# Altium PCB V6.pcbdoc
Units mil, origin at the board's own origin, x right, y up, seen from the top; angles counter-clockwise.
Board outline 9149.63 x 2054.4 mil, 2 copper layers (Top Layer, Bottom Layer); 47 components, 58 nets, 217 pads, 23 vias.
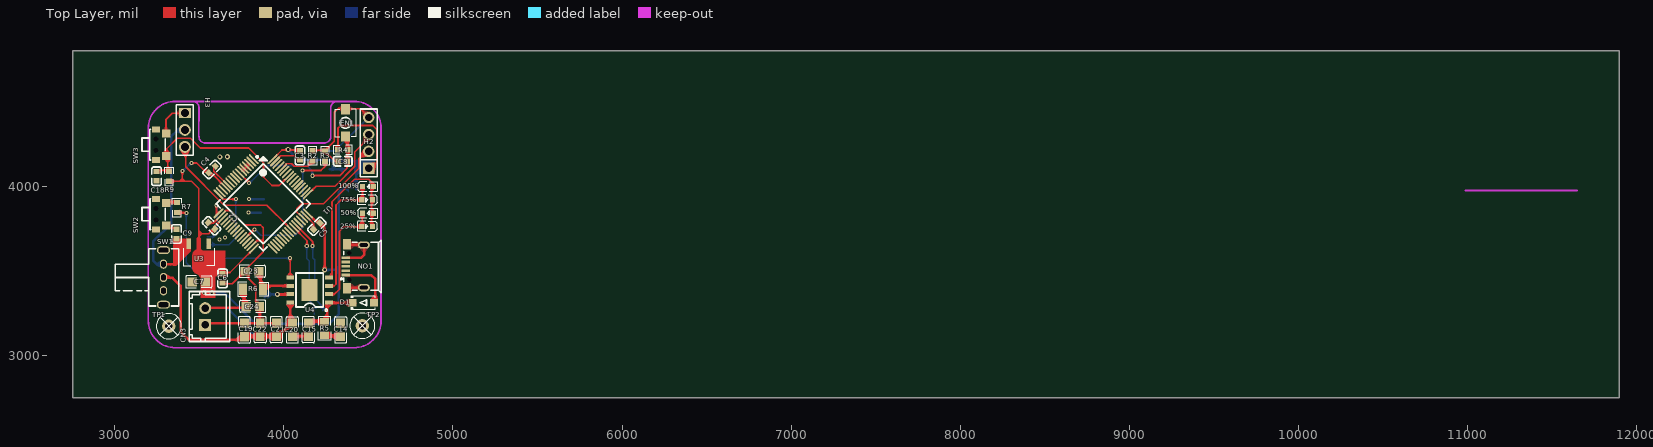
[diagram p0: Top Layer view]
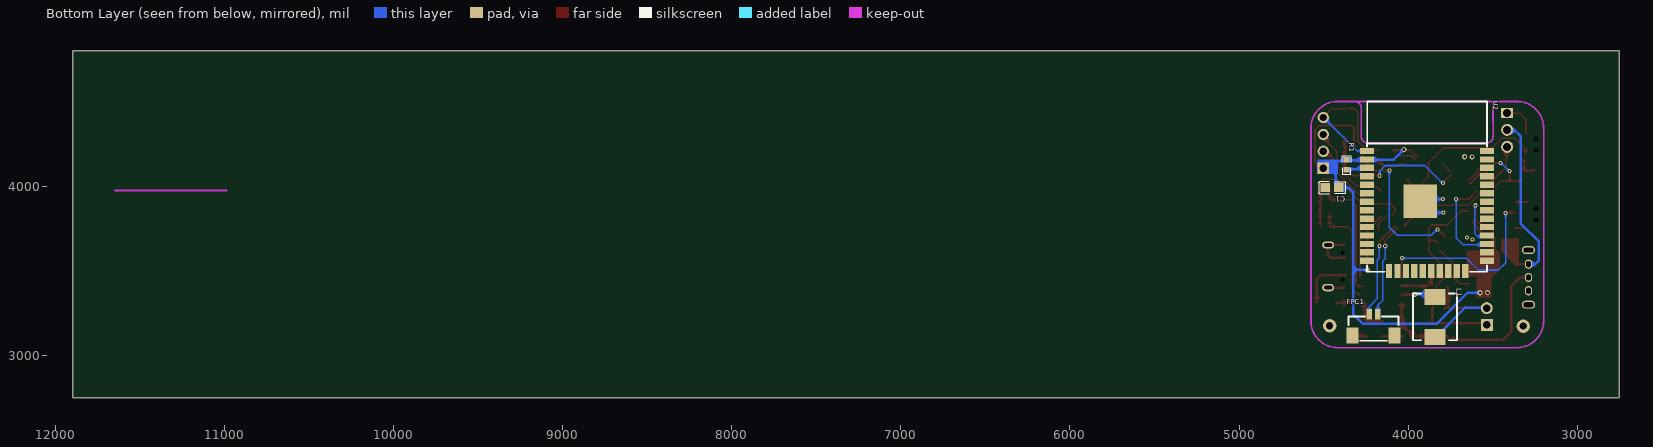
[diagram p1: Bottom Layer view, seen from below]

## Layer stack, top to bottom
Top Layer: signal copper (thickness not stored)
Dielectric: dielectric 12.6, FR-4, Dk 4.8
Bottom Layer: signal copper (thickness not stored)

## Board outline
11899.63,2750 2750,2750 2750,4804.4 11899.63,4804.4

## Components (designator, comment, footprint, x,y, rotation, side; value= is the part's Value field where it differs from the comment)
25% "19-217/GHC-YR1S2/3T" LED0603-RD 4492.49,3764.22 r180 top
50% "19-217/GHC-YR1S2/3T" LED0603-RD 4496.39,3842.58 r0 top
75% "19-217/GHC-YR1S2/3T" LED0603-RD 4492.49,3921.79 r180 top
100% "19-217/GHC-YR1S2/3T" LED0603-RD 4496.39,4000.14 r0 top
C1 "10uF" C0805 4450.2,3993.13 r0 bottom
C2 "104" C0603 3571.42,3768.45 r135 top
C3 "104" C0603 4094.39,4184.4 r270 top
C4 "104" C0603 3574.99,4101.12 r45 top
C5 "104" C0603 4194.47,3764.96 r225 top
C6 "104" C0603 3637.53,3457.25 r90 top
C7 "10uF" C0805 3496.63,3435.97 r180 top
C8 "104" C0603 4348.46,4149.75 r0 top
C9 "104" C0603 3364.45,3719.54 r270 top
C14 "GRM21BR61H106KE43L" C0805 4334.92,3152.59 r270 top
C15 "GRM21BR61H106KE43L" C0805 4144.33,3152.59 r90 top
C18 "104" C0603 3247.05,4061.24 r90 top
C19 "C2012X5R1V226MT000E" C0805 3765.64,3151.92 r90 top
C20 "C2012X5R1V226MT000E" C0805 4049.56,3152.59 r270 top
C21 "C2012X5R1V226MT000E" C0805 3954.79,3152.59 r90 top
C22 "C2012X5R1V226MT000E" C0805 3860.03,3152.59 r90 top
C23 "C2012X5R1V226MT000E" C0805 3811.69,3499.18 r180 top
C24 "C2012X5R1V226MT000E" C0805 3816.3,3291.18 r0 top
CN3 "HX25003-2A" CONN-TH_2P-P2.50_HX25003-2A 3534.5,3231.54 r90 top
D1 "SS14_C2909920" SOD-123FL_L2.8-W1.8-LS3.7-RD 4468.7,3312.8 r0 top
EN1 "TSA343G00-250J2" SW-SMD_L4.0-W2.9-LS5.0 4364.03,4376.95 r90 top
FPC1 "1.25-2PS" CONN-SMD_2P-P1.25_DEALON_1.25-2PS 4204.35,3181.72 r180 bottom
H2 "PH-00015" HDR-TH_4P-P2.54-V-M 4501.53,4258.52 r90 top
H3 "Z-211-0311-0021-001" HDR-TH_3P-P2.54-V-M-1 3414.45,4335.19 r270 top
L1 "FXL0618-1R0-M" IND-SMD_L7.0-W6.6 3841.08,3229.24 r270 bottom
NO1 "MICROUSB-5PIN" USB-SMD_5P_MICROUSB-5PIN 4419.71,3528.39 r90 top
R1 "10k" R0603 4364.13,4128.44 r270 bottom
R2 "0603WAF1003T5E" R0603 4169.68,4181.46 r90 top
R3 "0603WAF1003T5E" R0603 4242.48,4180.47 r90 top
R4 "ERA3VEB1001V" R0603 4348.24,4217.87 r0 top
R5 "0805W8F200KT5E" R0805 4239.62,3160.56 r90 top
R6 "1206W4F500LT5E" R1206 3816.81,3393.06 r180 top
R7 "0603WAF1002T5E" R0603 3366.93,3876.11 r270 top
R9 "0603WAF1002T5E" R0603 3320.22,4060.1 r270 top
SW1 "SK-12D02-VG5_C136722" SW-TH_SK-12D02-VG5 3287.79,3462.44 r270 top
SW2 "TS24CA" SW-SMD_TS24CA 3273.5,3836.64 r90 top
SW3 "TS24CA" SW-SMD_TS24CA 3273.25,4248 r90 top
TP1 "M2螺丝" M2螺丝 3319.05,3174.25 r0 top
TP2 "M2螺丝" M2螺丝 4463.85,3176.59 r0 top
U1 "STM32F103RCT6" LQFP-64_L10.0-W10.0-P0.50-LS12.0-BL 3877.67,3897.81 r225 top
U2 "ESP32-WROOM-32D-N4_C473012" WIFIM-SMD_39P-L25.5-W18.0-P1.27-BL 3887.77,3855.66 r270 bottom
U3 "AMS1117-3.3_C880752" SOT-89-3_L4.5-W2.5-P1.50-LS4.2-BR 3496.16,3608.82 r90 top
U4 "IP5306" ESOP-8_L4.9-W3.9-P1.27-LS6.0-BL-EP 4152.01,3388.12 r90 top

## Footprints (in the part's own frame and the unit in brackets; to place one, negate y for a bottom-side part, rotate by r counter-clockwise, add the part's x,y. Pads: shape width x height; smd on the part's side, far side on the other; paste and mask are expansions set on the pad)
C0603 [mm]
  rect 0.8x0.9 smd paste+0 mask+0.051: 1(-0.7,0) 2(0.7,0)
  silkscreen extent -1.41,-0.71 1.39,0.72
C0805 [mm]
  rect 1.41x1.35 smd paste-100 mask+0.051: 1(-1,0) 2(1,0)
  silkscreen extent -1.96,-0.9 1.96,0.9
CONN-SMD_2P-P1.25_DEALON_1.25-2PS [mm]
  rect 0.8x1.6 smd paste+0 mask+0.05: 1(-0.625,1.6) 2(0.625,1.6)
  rect 1.8x2.4 smd paste+0 mask+0.05: 3(-3.175,-1.6) 4(3.175,-1.6)
  silkscreen extent -3.75,-2.4 3.75,1.25
CONN-TH_2P-P2.50_HX25003-2A [mm]
  rect 1.8x1.8 hole 1.1 paste+0 mask+0.05: 1(-1.25,0)
  round 1.8 hole 1.1 paste+0 mask+0.05: 2(1.25,0)
  silkscreen extent -3.75,-3.7 3.75,2.41
ESOP-8_L4.9-W3.9-P1.27-LS6.0-BL-EP [mm]
  rect 0.6x1.2 smd paste+0 mask+0.051: 1(-1.905,-2.908) 2(-0.635,-2.908) 3(0.635,-2.908) 4(1.905,-2.908) 5(1.905,2.908) 6(0.635,2.908) 7(-0.635,2.908) 8(-1.905,2.908)
  rect 3.3x2.4 smd paste+0 mask+0.051: 9(0,0)
  silkscreen extent -3.2,-2.67 2.55,2.05
HDR-TH_3P-P2.54-V-M-1 [mm]
  rect 1.575x1.8 hole 1.2 paste+0 mask+0.051: 1(-2.54,0)
  round 1.8 hole 1.2 paste+0 mask+0.051: 2(0,0) 3(2.54,0)
  silkscreen extent -3.81,-1.27 3.81,1.27
HDR-TH_4P-P2.54-V-M [mm]
  rect 1.7x1.7 hole 1.1 paste+0 mask+0.051: 1(-3.81,0)
  round 1.7 hole 1.1 paste+0 mask+0.051: 2(-1.27,0) 3(1.27,0) 4(3.81,0)
  silkscreen extent -5.08,-1.27 5.08,1.27
IND-SMD_L7.0-W6.6 [mm]
  rect 2.4x3.2 smd paste+0 mask+0.051: 1(-3,0) 2(3,0)
  silkscreen extent -3.5,-3.3 3.5,3.3
LED0603-RD [mm]
  rect 0.8x0.8 smd paste+0 mask+0.051: 1(-0.799,-0.003) 2(0.799,0.003)
  silkscreen extent -1.49,-0.75 1.39,0.76
LQFP-64_L10.0-W10.0-P0.50-LS12.0-BL [mm]
  oval 0.3x2 smd paste+0 mask+0.051: 1(-3.75,-5.75) 2(-3.25,-5.75) 3(-2.75,-5.75) 4(-2.25,-5.75) 5(-1.75,-5.75) 6(-1.25,-5.75) 7(-0.75,-5.75) 8(-0.25,-5.75) 9(0.25,-5.75) 10(0.75,-5.75) 11(1.25,-5.75) 12(1.75,-5.75) 13(2.25,-5.75) 14(2.75,-5.75) 15(3.25,-5.75) 16(3.75,-5.75) 33(3.75,5.75) 34(3.25,5.75) 35(2.75,5.75) 36(2.25,5.75) 37(1.75,5.75) 38(1.25,5.75) 39(0.75,5.75) 40(0.25,5.75) 41(-0.25,5.75) 42(-0.75,5.75) 43(-1.25,5.75) 44(-1.75,5.75) 45(-2.25,5.75) 46(-2.75,5.75) 47(-3.25,5.75) 48(-3.75,5.75)
  oval 2x0.3 smd paste+0 mask+0.051: 17(5.75,-3.75) 18(5.75,-3.25) 19(5.75,-2.75) 20(5.75,-2.25) 21(5.75,-1.75) 22(5.75,-1.25) 23(5.75,-0.75) 24(5.75,-0.25) 25(5.75,0.25) 26(5.75,0.75) 27(5.75,1.25) 28(5.75,1.75) 29(5.75,2.25) 30(5.75,2.75) 31(5.75,3.25) 32(5.75,3.75) 49(-5.75,3.75) 50(-5.75,3.25) 51(-5.75,2.75) 52(-5.75,2.25) 53(-5.75,1.75) 54(-5.75,1.25) 55(-5.75,0.75) 56(-5.75,0.25) 57(-5.75,-0.25) 58(-5.75,-0.75) 59(-5.75,-1.25) 60(-5.75,-1.75) 61(-5.75,-2.25) 62(-5.75,-2.75) 63(-5.75,-3.25) 64(-5.75,-3.75)
  silkscreen extent -5,-5.79 5,5
M2螺丝 [mm]
  round 2 hole 1.07 mask+0.051: 1(0,0)
  silkscreen extent -1.9,-1.9 1.9,1.9
R0603 [mil]
  rect 31.75x34.02 smd paste-3937.01 mask+2: 1(-29.66,0) 2(29.66,0)
  silkscreen extent -55,-26 55,26
R0805 [mm]
  rect 1.133x1.377 smd paste-100 mask+0.051: 1(-1,0) 2(1,0)
  silkscreen extent -1.76,-0.92 1.76,0.92
R1206 [mil]
  rect 47.54x66.97 smd paste-3937.01 mask+2: 1(-58.22,0) 2(58.22,0)
  silkscreen extent -91,-42 91,42
SOD-123FL_L2.8-W1.8-LS3.7-RD [mm]
  rect 1.2x1.2 smd paste+0 mask+0.051: 1(-1.6,0) 2(1.6,0)
  silkscreen extent -1.9,-1 1.8,1
SOT-89-3_L4.5-W2.5-P1.50-LS4.2-BR [mm]
  rect 1.575x0.672 smd paste+0 mask+0.051: 1(1.356,-1.5) 3(1.356,1.5)
  Top Layer region: -2.283,0.95 -0.429,0.95 -0.384,0.949 -0.34,0.946 -0.296,0.94 -0.252,0.933 -0.208,0.924 -0.165,0.912 -0.123,0.899 -0.081,0.884 -0.04,0.866 0,0.847 0.04,0.826 0.078,0.803 0.115,0.779 0.151,0.752 0.185,0.724 0.219,0.695 0.251,0.664 0.281,0.631 0.31,0.597 0.337,0.562 0.362,0.525 0.386,0.488 0.408,0.449 0.428,0.409 0.447,0.33 2.144,0.33 2.144,-0.33 0.447,-0.33 0.428,-0.409 0.408,-0.449 0.386,-0.488 0.362,-0.526 0.337,-0.562 0.31,-0.597 0.281,-0.631 0.251,-0.664 0.219,-0.695 0.185,-0.725 0.151,-0.753 0.115,-0.779 0.078,-0.804 0.04,-0.827 0,-0.848 -0.04,-0.867 -0.081,-0.884 -0.123,-0.899 -0.165,-0.913 -0.208,-0.924 -0.252,-0.934 -0.296,-0.941 -0.34,-0.946 -0.384,-0.949 -0.429,-0.95 -2.283,-0.95 -2.328,-0.949 -2.372,-0.946 -2.416,-0.941 -2.46,-0.934 -2.504,-0.924 -2.547,-0.913 -2.589,-0.899 -2.631,-0.884 -2.672,-0.867 -2.713,-0.848 -2.752,-0.827 -2.79,-0.804 -2.827,-0.779 -2.863,-0.753 -2.898,-0.725 -2.931,-0.695 -2.963,-0.664 -2.993,-0.631 -3.022,-0.597 -3.049,-0.562 -3.075,-0.526 -3.098,-0.488 -3.12,-0.449 -3.141,-0.409 -3.159,-0.369 -3.175,-0.327 -3.189,-0.285 -3.202,-0.242 -3.212,-0.199 -3.22,-0.155 -3.227,-0.111 -3.231,-0.067 -3.233,-0.022 -3.233,0.022 -3.231,0.067 -3.227,0.111 -3.22,0.155 -3.212,0.199 -3.202,0.242 -3.189,0.285 -3.175,0.327 -3.159,0.369 -3.141,0.409 -3.12,0.449 -3.098,0.488 -3.075,0.525 -3.049,0.562 -3.022,0.597 -2.993,0.631 -2.963,0.664 -2.931,0.695 -2.898,0.724 -2.863,0.752 -2.827,0.779 -2.79,0.803 -2.752,0.826 -2.713,0.847 -2.672,0.866 -2.631,0.884 -2.589,0.899 -2.547,0.912 -2.504,0.924 -2.46,0.933 -2.416,0.94 -2.372,0.946 -2.328,0.949
  silkscreen extent -1.95,-2.33 0.7,2.33
SW-SMD_L4.0-W2.9-LS5.0 [mm]
  rect 1.53x1.36 smd paste+0 mask+0.051: 1(-2.035,0) 2(2.035,0)
  silkscreen extent -2.08,-1.58 2.08,1.58
SW-SMD_TS24CA [mm]
  rect 0.9x1.2 smd paste+0 mask+0.051: 1(-2.3,0.775) 2(2.3,0.775)
  rect 1.2x1.3 smd paste+0 mask+0.051: 3(-1.675,-0.775) 4(1.675,-0.775)
  Multi-Layer board cut-out: -0.85,0.425 -0.698,0.46 -0.576,0.557 -0.509,0.697 -0.509,0.853 -0.576,0.993 -0.698,1.09 -0.85,1.125 -0.85,1.125 -1.002,1.09 -1.124,0.993 -1.191,0.853 -1.191,0.697 -1.124,0.557 -1.002,0.46 -0.85,0.425
  Multi-Layer board cut-out: 0.85,0.425 1.002,0.46 1.124,0.557 1.191,0.697 1.191,0.853 1.124,0.993 1.002,1.09 0.85,1.125 0.85,1.125 0.698,1.09 0.576,0.993 0.509,0.853 0.509,0.697 0.576,0.557 0.698,0.46 0.85,0.425
  silkscreen extent -2.3,-0.62 2.3,2.88
SW-TH_SK-12D02-VG5 [mm]
  oval 1.4x1.1 hole 0.7 slot 0.9 at 0 deg copper offset 0.001,0 paste+0 mask+0.051: 1(-2,-0.001)
  oval 1.4x1.1 hole 0.7 slot 0.9 at 0 deg paste+0 mask+0.051: 2(0,0)
  oval 1.4x1.1 hole 0.7 slot 0.9 at 0 deg copper offset -0.001,0 paste+0 mask+0.051: 3(2,0.001)
  oval 1.2x2 hole 0.7 slot 1.5 at 90 deg copper offset 0,-0.001 paste+0 mask+0.051: 4(4.099,0)
  oval 1.2x2 hole 0.7 slot 1.5 at 90 deg copper offset 0,0 paste+0 mask+0.051: 5(-4.1,0)
  silkscreen extent -4.3,-7.25 4.3,2.27
USB-SMD_5P_MICROUSB-5PIN [mm]
  rect 0.4x1.3 smd paste-100 mask+0.05: 1(-1.3,1.345) 2(-0.65,1.345) 3(0,1.345) 4(0.65,1.345) 5(1.3,1.345)
  rect 1.6x1.2 smd paste-100 mask+0.05: 6(3.3,1.185) 7(-3.3,1.185)
  oval 1.1x1.8 hole 0.5 slot 1.2 at 90 deg paste+0 mask+0.05: 8(3.2,-1.345) 9(-3.2,-1.345)
  Multi-Layer board cut-out: 2,0.555 2.13,0.585 2.235,0.668 2.292,0.788 2.292,0.922 2.235,1.042 2.13,1.125 2,1.155 2,1.155 1.87,1.125 1.765,1.042 1.708,0.922 1.708,0.788 1.765,0.668 1.87,0.585 2,0.555
  Multi-Layer board cut-out: -2,0.525 -1.87,0.555 -1.765,0.638 -1.708,0.758 -1.708,0.892 -1.765,1.012 -1.87,1.095 -2,1.125 -2,1.125 -2.13,1.095 -2.235,1.012 -2.292,0.892 -2.292,0.758 -2.235,0.638 -2.13,0.555 -2,0.525
  silkscreen extent -3.99,-3.96 3.93,2.14
WIFIM-SMD_39P-L25.5-W18.0-P1.27-BL [mm]
  rect 0.95x2.1 smd paste+0 mask+0.051: 1(-9.015,-9) 2(-7.745,-9) 3(-6.475,-9) 4(-5.205,-9) 5(-3.935,-9) 6(-2.665,-9) 7(-1.395,-9) 8(-0.125,-9) 9(1.145,-9) 10(2.415,-9) 11(3.685,-9) 12(4.955,-9) 13(6.225,-9) 14(7.495,-9) 25(7.495,9) 26(6.225,9) 27(4.955,9) 28(3.685,9) 29(2.415,9) 30(1.145,9) 31(-0.125,9) 32(-1.395,9) 33(-2.665,9) 34(-3.935,9) 35(-5.205,9) 36(-6.475,9) 37(-7.745,9) 38(-9.015,9)
  rect 2.1x0.95 smd paste+0 mask+0.051: 15(9.015,-5.715) 16(9.015,-4.445) 17(9.015,-3.175) 18(9.015,-1.905) 19(9.015,-0.635) 20(9.015,0.635) 21(9.015,1.905) 22(9.015,3.175) 23(9.015,4.445) 24(9.015,5.715)
  rect 5x5 smd paste+0 mask+0.051: 39(-1.472,-1.017)
  silkscreen extent -16.44,-9.02 9.12,9.02

## Via types
v1: diameter 24, hole 12, Top Layer to Bottom Layer, 16 vias
v2: diameter 30, hole 15, Top Layer to Bottom Layer, 7 vias

## Nets (pads, with @x,y where several pads share a name; then routed paths per layer and width w, separated by ;. In a path a pad name is that pad's centre, name@x,y a point inside that pad or via, vN(x,y) a via of type N, cw(c..) or ccw(c..) an arc to the next point about the centre after c; other vN are vias at no path point)
3V3: C1.1 C2.1 C3.1 C4.1 C5.1 C6.2 C7.1 H2.1 R1.1 R4.1 R9.2 U1.13 U1.19 U1.32 U1.48 U1.64 U2.2 | length 4903.4
  Top Layer w10: R9.2@3322.52,4033.51 3324.38,4031.65 3404.86,4031.65 ; v1@3403.24,4091.19 3399.55,4087.5 3399.55,4036.96 3404.86,4031.65 ; v1(3453.85,4139.13) 3484.23,4139.13 C4.1@3548.29,4075.06 ; 3496.43,3680.1 3496.43,3685.19 ; C4.1@3555.87,4081.03 3570.02,4081.03 U1.13@3635.09,4015.95 ; C2.1@3586.23,3759.77 U1.19@3619.3,3792.83 ; C2.1@3599.29,3751.36 3584.6,3751.36 3554.97,3721.73 3496.43,3721.73 ; C6.2@3637.88,3491.86 3680.67,3491.86 U1.32@3807.77,3618.97 ; U1.64@3945.74,4173.16 3988.52,4215.94 C3.1@4094.54,4215.94 ; U1.48@4158.98,3824.84 4209.41,3774.41 C5.1@4215.61,3774.41 ; R4.1@4319.43,4226.19 4319.43,4344.61 4336.17,4361.35 4525.44,4361.35 4550.8,4335.99 4550.8,4143.17 H2.1@4527.24,4119.61 ; 3404.86,4031.65 3453.78,4031.65 3496.43,3989 3496.43,3721.73 ; 3496.43,3685.19 3496.35,3699.33 3496.43,3699.41 ; 3496.43,3685.19 3496.43,3699.41 ; 3496.43,3699.41 3496.43,3721.73
  Top Layer w15: 3495.59,3550.53 3515.43,3530.69 3515.43,3453.7 3517.08,3452.05 C7.1@3517.08,3451.84 ; C5.1@4216.8,3772.9 4240.98,3748.72 v2(4240.98,3506.91)
  Bottom Layer w10: v1(3400.59,4090.97) 3448.75,4139.13 v1(3453.85,4139.13)
  Bottom Layer w15: v2(3573.71,3372.05) 3648.19,3372.05 3832.34,3187.9 4267.58,3187.9 4324.2,3244.52 4324.2,3506.91 ; v2@4035.7,4208.76 4085.93,4158.54 U2.2@4240,4158.54 ; v2@4240.98,3505.98 4241.91,3506.91 4324.2,3506.91 ; U2.2@4262.35,4154.77 R1.1@4367.44,4154.77 ; R1.1@4366.67,4150.66 4429.21,4150.66 ; C1.1@4406.36,3993.56 4352.42,3993.56 4324.2,3965.33 4324.2,3506.91 ; C1.1@4429.21,3984.34 4429.21,4150.66 ; H2.1@4499.19,4111.6 4460.13,4150.66 4429.21,4150.66 ; H2.1@4501.36,4091.71 4501.36,4112.92 H2.1@4504.15,4115.71
  other v2: 3530.31,3372.67 4025.16,4219.41
5V: C15.2 D1.1 R5.2 U4.1 | length 355.6
  Top Layer w15: C15.2@4152.04,3204.56 4247.83,3204.56 R5.2@4250.62,3207.35 ; R5.2@4256.2,3212.93 4256.2,3311.51 U4.1@4258.99,3314.3 ; U4.1@4268.29,3312.44 4418.95,3312.44 D1.1@4420.81,3310.58
$2N62477: FPC1.1 U1.43 | length 568
  Top Layer w10: U1.43@4076.92,3768 4170.3,3674.62 v1(4170.3,3648.44)
  Bottom Layer w10: v1(4170.3,3648.44) 4170.3,3577.49 4181.6,3566.19 4181.6,3338.03 4233.58,3286.05 4233.58,3271.48 FPC1.1@4228.93,3266.83
$2N62479: FPC1.2 U1.42 | length 560.7
  Top Layer w10: U1.42@4060.52,3755.67 4136.3,3679.89 4136.3,3650.82 v1(4135.17,3649.68)
  Bottom Layer w10: v1(4135.17,3649.68) 4135.17,3574.35 4149.67,3559.85 4149.67,3326.49 4178.6,3297.55 FPC1.2@4178.6,3244.82
$2N80053: C23.1 R6.1 U4.6 | length 240.7
  Top Layer w15: R6.1@3861.09,3415.68 C23.1@3861.09,3500.31 ; R6.1@3884.83,3413.95 3886.69,3412.09 U4.6@4040.14,3412.09
$2N80054: L1.1 U4.7 | length 153.6
  Top Layer w15: v2(3961.6,3362.17) 3962.84,3360.93 4032.7,3360.93 U4.7@4033.63,3361.86
  Bottom Layer w15: L1.1@3887.62,3346.05 3903.74,3362.17 v2(3961.6,3362.17)
$2N80056: C14.2 R5.1 | length 87.4
  Top Layer w15: R5.1@4244.57,3115.13 C14.2@4332,3115.13
$2N80057: 75%.2 100%.1 U4.3 | length 758.6
  Top Layer w10: U4.3@4264.72,3411.03 4295.35,3411.03 4308.44,3424.11 4308.44,3890.91 4340.06,3922.53 4455.38,3922.53 75%.2@4459.1,3926.25 ; 75%.2@4461.58,3924.32 4464.37,3927.11 100%.1@4464.37,4000.58
$2N80059: 25%.1 50%.2 75%.1 100%.2 U4.4 | length 985.9
  Top Layer w10: U4.4@4284.26,3471.04 4284.26,3909.75 4418.02,4043.51 4502.81,4043.51 4519.24,4027.08 100%.2@4519.24,4010.34 ; 25%.1@4516.45,3767.14 4518.31,3769 100%.2@4518.31,3999.65
$2N80060: 25%.2 50%.1 U4.2 | length 631
  Top Layer w10: U4.2@4279.6,3362.2 4298.21,3362.2 4328.9,3392.89 4328.9,3735.14 4355.87,3762.11 25%.2@4463.75,3762.11 ; 50%.1@4463.44,3841.55 4463.44,3763.42 25%.2@4465.3,3761.56
$2N80061: R7.1 SW2.4 | length 73.9
  Top Layer w10: SW2.4@3292.64,3909.15 3365.18,3909.15 R7.1@3366.11,3908.22
$2N80063: R7.2 U4.5 | length 1129.6
  Top Layer w10: R7.2@3362.85,3844.64 3421.44,3844.64 v1(3422.83,3843.24) ; v1(4036.33,3576.48) 4036.33,3576.37 4036.88,3575.82 U4.5@4036.88,3461.43
  Bottom Layer w10: v1(3422.83,3843.24) 3422.83,3550.29 3466.85,3506.27 3583.88,3506.27 3654.1,3576.48 v1(4036.33,3576.48)
$2N80065: C19.1 C20.1 C21.1 C22.1 SW1.2 U4.8 | length 1196.8
  Top Layer w15: SW1.2@3285.32,3459.52 3342.05,3459.52 3389.48,3412.09 3389.48,3143.31 3439.7,3093.09 C19.1@3761.48,3093.09 ; C19.1@3767.99,3112.62 3769.85,3114.48 C21.1@3950.28,3114.48 ; C21.1@3974.25,3122.13 4037.49,3185.37 C20.1@4037.49,3185.57 ; U4.8@4037.49,3313.3 C20.1@4037.49,3185.57 ; C20.1@4039.97,3183.09 C20.1@4037.49,3185.57 ; C20.1@4044.93,3185.57 C20.1@4037.49,3185.57
BOOT0: R2.1 U1.60 | length 203.6
  Top Layer w10: U1.60@3999.41,4118.18 4016.77,4135.54 4045.91,4135.54 4062.11,4119.34 4141.93,4119.34 4174.87,4152.29 R2.1@4175.49,4152.29
BOOT1: R3.1 U1.28 | length 890.4
  Top Layer w10: U1.28@3780,3702.62 3824.64,3747.26 v1(3826.5,3747.26) ; v1(4110.9,4094.93) 4218.89,4094.93 4244.39,4120.43 R3.1@4244.39,4147.79
  Bottom Layer w10: v1@3826.81,3747.88 3862.15,3712.54 4064.63,3712.54 4110.9,3758.81 v1(4110.9,4094.93)
CLK: U2.20
CMD: U2.19
EN: R1.2 U2.3 | length 92.5
  Bottom Layer w15: U2.3@4272.58,4102.69 4363.72,4102.69 R1.2@4364.65,4101.76
GND: C1.2 C2.2 C3.2 C4.2 C5.2 C6.1 C7.2 C8.1 C9.1 C14.1 C15.1 C18.1 C19.2 C20.2 C21.2 C22.2 C23.2 C24.2 CN3.1 EN1.2 H2.4 H3.1 NO1.5 NO1.6 NO1.7 NO1.8 NO1.9 R2.2 R3.2 SW2.3 SW3.4 U1.3 U1.4 U1.5 U1.6 U1.12 U1.18 U1.31 U1.47 U1.63 U2.1 U2.15 U2.38 U2.39 U3.1 U4.9 | length 3759.9
  Top Layer w10: SW3.4@3302.07,4313.6 3302.07,4395.44 3340.2,4433.57 H3.1@3409.02,4433.57 ; SW2.3@3309.5,3761.02 3315.08,3755.44 C9.1@3367.16,3755.44 ; C2.2@3559.91,3785.12 3561.15,3783.88 3582.65,3783.88 U1.18@3608.69,3809.92 ; C4.2@3585.91,4111.43 3585.91,4090.76 U1.12@3646.25,4030.42 ; C6.1@3636.98,3425.16 3693.71,3425.16 C23.2@3762.53,3493.98 ; U1.18@3649.44,3851.25 3656.88,3858.69 3682.92,3858.69 3768.48,3773.13 3861.49,3773.13 3878.48,3756.14 3878.48,3681.14 ; U1.6@3751.15,4092.15 3752.8,4092.15 U1.3@3794.55,4133.89 ; C23.2@3787.96,3523.03 3878.48,3613.55 3878.48,3681.14 ; C23.2@3791.06,3485.83 3791.06,3454.83 3833.22,3412.67 C24.2@3833.22,3312.23 ; U1.31@3826.4,3666.25 3841.28,3681.14 3878.48,3681.14 ; U1.63@3959.66,4159.52 3959.66,4161.03 3981.7,4183.08 4059.82,4183.08 4076.36,4166.55 C3.2@4076.91,4166.55 ; U1.47@4127.15,3828.98 4174.69,3781.44 C5.2@4174.69,3745.48 ; R2.2@4172.61,4214.86 4240.2,4214.86 R3.2@4240.82,4214.24 ; R3.2@4240.82,4211.14 4297.86,4268.18 4297.86,4438.68 4320.8,4461.62 4352.42,4461.62 EN1.2@4354.28,4463.48 ; R3.2@4248.75,4203.25 4303.31,4148.69 4304.37,4149.76 C8.1@4318.72,4149.76 ; EN1.2@4367.92,4461 4452.86,4461 H2.4@4496.88,4416.98
  Top Layer w15: CN3.1@3534.61,3193.99 3535.99,3192.6 C21.2@3954.93,3192.6 ; C24.2@3853.55,3284.67 3857.27,3280.95 C22.2@3857.27,3195.39 ; C20.2@4031.19,3112.62 4033.98,3115.41 C15.1@4151.16,3115.41 ; NO1.5@4375.19,3578.65 4456.31,3578.65 4473.96,3596.31 NO1.8@4473.96,3638.26 ; NO1.6@4378.5,3654.71 4470.26,3654.71 NO1.8@4473.15,3651.81 ; NO1.7@4380.15,3404.02 4382.01,3402.16 NO1.9@4469.43,3402.16
  Bottom Layer w10: U2.1@4248.18,4210.21 4301.19,4210.21 H2.4@4495.56,4404.58
  Bottom Layer w15: v1@3791.56,3924.56 3792.23,3925.23 U2.39@3880.53,3925.23 ; v1@3792.04,3844.89 3792.04,3845.51 U2.39@3862.99,3845.51
  other v1: 3618.31,3686.17 3651.53,3698.66 3791.73,3846.18 3792.42,3925.7
  other v2: 3621.68,4175.86 3665.7,4176.32
IO0: U2.25
IO2: U2.24
IO4: U2.26
IO5: U2.29
IO12: U2.14
IO13: U2.16
IO14: U2.13
IO15: U2.23
IO16: U1.16 U2.27 | length 558.8
  Top Layer w10: U1.16@3592.55,3973.67 3641.53,3924.69 3713.31,3924.69 v1@3713.86,3925.24
  Bottom Layer w10: U2.27@3544.71,3655.92 3674.89,3655.92 3714.59,3695.62 3714.59,3925.21 v1(3715.31,3925.93)
IO17: U1.17 U2.28 | length 290.6
  Top Layer w10: v1(3601.28,3889.43) 3600.81,3888.96 3600.81,3846.99 3608.81,3838.99 U1.17@3611.07,3838.99
  Bottom Layer w10: U2.28@3547.81,3703.04 3585.94,3703.04 3605.47,3722.57 3605.47,3885.24 v1(3601.28,3889.43)
IO18: U2.30
IO19: U2.31
IO21: U2.33
IO22: U2.36
IO23: U2.37
IO25: U2.10
IO26: U2.11
IO27: U2.12
IO32: U2.8
IO33: U2.9
IO34: U2.6
IO35: U2.7
PA8: H3.3 U1.41 | length 862.9
  Top Layer w10: H3.3@3418.92,4231.38 3418.92,4116.86 3645.4,3890.38 3899.01,3890.38 U1.41@4022.39,3766.99
PB5: C18.2 R9.1 SW3.3 U1.57 | length 1086.2
  Top Layer w10: C18.2@3244.33,4096.91 R9.1@3312.54,4096.91 ; SW3.3@3305.31,4192.79 3305.31,4221.91 3368.56,4285.17 3447.75,4285.17 3504.94,4227.97 3791.7,4227.97 3879.12,4140.55 3879.12,4056.54 3929.5,4006.16 3973.05,4006.16 4007.93,4041.04 U1.57@4009.32,4041.04 ; R9.1@3310.68,4091.33 3312.54,4093.19 R9.1@3312.54,4096.91 ; SW3.3@3312.54,4159.53 R9.1@3312.54,4096.91 ; R9.1@3322.46,4095.67 3321.22,4096.91 R9.1@3312.54,4096.91
RESET: C8.2 EN1.1 R4.2 U1.7 | length 1002.9
  Top Layer w10: U1.7@3741.12,4074.63 3794,4021.76 v1(3794,4021.31) ; v1@4166,4061.3 4167.04,4061.3 4170.71,4064.97 4329.79,4064.97 4373.14,4108.31 C8.2@4373.14,4144.12 ; C8.2@4375.23,4146.21 4375.23,4291.29 EN1.1@4377.09,4293.15 ; 4375.97,4236.16 4377.09,4237.28 EN1.1@4377.09,4293.15 ; EN1.1@4378.95,4295.01 EN1.1@4377.09,4293.15
  Bottom Layer w10: v1(3794,4021.31) 3798.65,4021.31 3901.88,4124.54 4134.38,4124.54 4167.86,4091.06 v1(4167.86,4064.09)
RXD0: U2.34
SD0: U2.21
SD1: U2.22
SD2: U2.17
SD3: U2.18
SWCLK: H2.3 U1.49 | length 527.9
  Top Layer w10: U1.49@4156.65,3969.2 4157.07,3969.2 4190.55,4002.68 4302.05,4002.68 4419.85,4120.48 4419.85,4204.19 H2.3@4503.55,4287.89
SWDIO: H2.2 U1.46 | length 632.6
  Top Layer w10: U1.46@4093.72,3834.35 4092.48,3834.35 4076.78,3850.06 4076.78,3869.48 4105.3,3898 4234.26,3898 4444.55,4108.29 4444.55,4166.88 H2.2@4490.12,4212.45
TXD0: U2.35
VBUS: D1.2 NO1.1 | length 320.4
  Top Layer w15: NO1.1@4368.37,3476.7 4516.35,3476.7 4540.73,3452.31 4540.73,3319.63 D1.2@4544.45,3315.91
VCCBAT: C24.1 CN3.2 L1.2 R6.2 | length 744.1
  Top Layer w15: CN3.2@3530.5,3286.31 3534,3282.81 3780.08,3282.81 C24.1@3782.87,3280.02 ; C24.1@3763.34,3295.83 3763.34,3401.86 R6.2@3767.06,3405.58
  Bottom Layer w15: CN3.2@3516.42,3283.12 3663.49,3283.12 L1.2@3826.67,3119.93
VCCIN: C9.2 H3.2 SW1.1 U3.3 | length 1237.6
  Top Layer w15: SW1.1@3302.15,3539.37 3356.71,3539.37 3365.39,3548.05 3365.39,3652.83 ; C9.2@3365.39,3691.89 3365.39,3652.83 ; U3.3@3440.72,3655.62 3437.93,3652.83 3365.39,3652.83
  Bottom Layer w15: SW1.1@3287.8,3539.88 3248.97,3539.88 3226.96,3561.9 3226.96,3674.9 3334.7,3782.64 3334.7,4298.9 3366.09,4330.29 H3.2@3420.49,4330.29
VN: U2.5
VP: U2.4
"": FPC1.3 FPC1.4 NO1.2 NO1.3 NO1.4 SW1.3 SW1.4 SW1.5 SW2.1 SW2.2 SW3.1 SW3.2 TP1.1 TP2.1 U1.1 U1.2 U1.8 U1.9 U1.10 U1.11 U1.14 U1.15 U1.20 U1.21 U1.22 U1.23 U1.24 U1.25 U1.26 U1.27 U1.29 U1.30 U1.33 U1.34 U1.35 U1.36 U1.37 U1.38 U1.39 U1.40 U1.44 U1.45 U1.50 U1.51 U1.52 U1.53 U1.54 U1.55 U1.56 U1.58 U1.59 U1.61 U1.62 U2.32

## Polygon pours and split planes (outlines as drawn)
GND on Top Layer (solid, remove dead copper, pour order 0): 3131.07,3006.89 4647.37,3006.89 4647.37,4550.89 3131.07,4550.89
GND on Bottom Layer (solid, remove dead copper, pour order 1): 3131.07,3000 4654.27,3000 4654.27,4554.4 3131.07,4554.4

## Keep-outs
Board Outline Layer:
  lines w10 net "": 3459.31,4503.66 cw(c3461.31,4467.46) 3497.45,4464.46 ; 3497.17,4296.3 3497.49,4468.5 ; 3497.25,4298.04 ccw(c3535.23,4296.04) 3536.85,4258.03 ; 3533.29,4258.09 4243.17,4257.88 ; 4236.96,4257.87 ccw(c4238.96,4295.85) 4276.97,4297.47 ; 4277,4296.15 4277.18,4467.02 ; 4277.14,4463.21 cw(c4316.05,4464.66) 4317.5,4503.57 ; 10989.63,3977.25 11649.63,3977.25 ; 3198.06,3205.03 ccw(c3355.54,3205.03) 3355.54,3047.55 4417.37,3047.55 ccw(c4417.37,3205.03) 4574.85,3205.03 4574.85,4346.08 ccw(c4417.37,4346.08) 4417.37,4503.56 3355.54,4503.56 ccw(c3355.54,4346.08) 3198.06,4346.08 3198.06,3205.03

## Other copper
Top Layer:
  region net 3V3: 3518.55,3459.53 3563.1,3459.53 3563.1,3477.13 3518.55,3477.13
  region net 3V3: 3508.47,3342.49 3594.66,3342.49 3594.66,3477.67 3508.47,3477.67
  region net VCCIN: 3449.93,3692.56 3449.93,3632.42 3449.31,3631.8 3449.31,3618.16 3362.51,3531.36 3346.39,3531.36 3346.39,3691.32 3345.15,3692.56
  region net 3V3: 3507.94,3468.83 3507.3,3618.43 3508.23,3619.36 3654.24,3619.36 3654.24,3471.49 3657.03,3468.7 3508.23,3468.7
  region net 3V3: 3378.52,4030.99 3399.52,4051.99 3399.52,4052.05 3420.02,4031.55 3420.02,4030.99
  region net 3V3: 3495.79,3745.52 3519.89,3721.42 3520.2,3721.42 3495.79,3697.02
  region net VCCIN: 3357.89,3653.74 3372.89,3653.74 3382.16,3676.24 3346.73,3676.24
  region net 3V3: 3670.25,3496.86 3655.25,3500.56 3655.25,3474.36 3670.25,3486.86
  region net BOOT0: 4020.3,4132.01 4013.23,4139.08 4008.51,4134.43 4016.86,4126.08
  region net PB5: 3990.61,4030.79 3999.33,4025.37 4011.29,4036.99 4002.94,4045.34
  region net SWCLK: 4182.3,3987.36 4173.88,3993.08 4161.62,3981.31 4169.98,3972.96
  region net 3V3: 4182.26,3808.63 4169.98,3822.65 4161.62,3814.3 4174.46,3802.29
  region net $2N62477: 4105.3,3732.56 4112.6,3739.39 4100.38,3753.05 4092.02,3744.7
  region net $2N62479: 4089.82,3719.3 4098.79,3724.47 4086.46,3739.13 4078.11,3730.78
  region net PA8: 4004.67,3777.65 4016.86,3764.18 4025.21,3772.53 4011.74,3784.72
  region net 3V3: 3781.94,3600.21 3789.23,3593.36 3802.51,3605.5 3794.16,3613.85
  region net BOOT1: 3806.33,3721.88 3799.37,3729.07 3785.81,3716.86 3794.16,3708.51
  region net 3V3: 3607.73,3774.2 3621.56,3786.46 3613.21,3794.81 3601.12,3781.73
  region net IO17: 3604.34,3850.53 3597.27,3843.46 3592.89,3830.17 3617.64,3854.92
  region net IO16: 3638,3921.16 3645.07,3928.23 3641.05,3933.99 3632.69,3925.64
  region net 3V3: 3623.31,4034.8 3614.8,4029.17 3627.13,4014.72 3635.48,4023.08
  region net RESET: 4370.23,4185.86 4380.23,4185.86 4392.73,4200.86 4362.03,4234.87
  region net RESET: 4370.23,4249.87 4362.03,4234.87 4392.73,4234.87 4380.23,4249.87
  region net 3V3: 4314.43,4249.87 4302.71,4234.87 4334.46,4234.87 4324.43,4249.87
  region net RESET: 4378.14,4117.04 4390.64,4132.04 4360.27,4132.04 4368.14,4117.04
  region net RESET: 4370.23,4182.47 4360.27,4167.47 4391.76,4167.47 4380.23,4182.47
  region net RESET: 4370.23,4251.72 4380.23,4251.72 4390.8,4266.72 4357.73,4266.72
  region net RESET: 4382.09,4251.72 4390.8,4266.72 4359.59,4266.72 4372.09,4251.72
  region net 3V3: 3559.88,3733.72 3566.95,3726.65 3586.4,3728.42 3567.24,3747.57
  region net 3V3: 3529.01,4101.41 3521.94,4094.34 3531.84,4083.03 3548.46,4099.64
  region net 3V3: 3589.13,4068.99 3579.16,4080.24 3562.61,4063.69 3582.06,4061.92
  region net 3V3: 4232.74,3746.35 4243.35,3756.96 4237.62,3783.05 4215.35,3760.78
  region net 3V3: 4187.07,3803.82 4180,3796.75 4190.3,3785.84 4206.51,3802.06
  region net $2N80056: 4285.84,3122.63 4285.84,3107.63 4308.34,3088.88 4308.34,3140.98
  region net 5V: 4193.4,3212.06 4170.9,3219.72 4170.9,3178.31 4193.4,3197.06
  region net $2N80060: 4430.27,3767.11 4430.27,3757.11 4445.27,3748.34 4445.27,3779.61
  region net $2N80060: 4468.44,3794.84 4458.44,3794.84 4445.94,3779.84 4476.76,3779.84
  region net $2N80059: 4523.31,3795.11 4513.31,3795.11 4508.22,3780.11 4535.81,3780.11
  region net $2N80059: 4523.31,3873.46 4513.31,3873.46 4512.12,3826.97 4535.81,3858.46
  region net $2N80059: 4523.31,3811.97 4535.81,3826.97 4512.12,3826.97 4513.31,3811.97
  region net $2N80060: 4468.44,3811.7 4480.66,3826.7 4449.17,3826.7 4458.44,3811.7
  region net $2N80057: 4430.27,3927.53 4430.27,3917.53 4445.27,3905.9 4445.27,3937.4
  region net $2N80057: 4469.37,3952.4 4459.37,3952.4 4446.87,3937.4 4476.76,3937.4
  region net $2N80059: 4523.31,3952.67 4513.31,3952.67 4508.22,3937.67 4535.81,3937.67
  region net $2N80059: 4523.31,3891.17 4535.81,3906.17 4508.22,3937.67 4513.31,3891.17
  region net $2N80059: 4523.31,3969.53 4535.81,3984.53 4512.12,3984.53 4513.31,3969.53
  region net $2N80059: 4514.24,4027.08 4512.12,4016.03 4536.74,4016.03 4524.24,4027.08
  region net $2N80057: 4469.37,3969.26 4480.66,3984.26 4449.17,3984.26 4459.37,3969.26
  region net 5V: 4248.7,3278.81 4263.7,3278.81 4282.45,3301.31 4242.89,3301.31
  region net 5V: 4312.64,3319.94 4290.14,3324.94 4290.14,3301.31 4312.64,3304.94
  region net $2N80060: 4298.21,3367.2 4290.14,3374.94 4290.14,3351.31 4298.21,3357.2
  region net $2N80057: 4295.35,3416.03 4290.14,3424.94 4290.14,3401.31 4295.35,3406.03
  region net $2N80059: 4289.26,3489.94 4279.26,3489.94 4266.76,3474.94 4290.14,3474.94
  region net $2N80063: 4031.88,3489.94 4019.38,3474.94 4054.38,3474.94 4041.88,3489.94
  region net $2N80053: 3991.39,3404.59 4013.89,3401.31 4013.89,3424.94 3991.39,3419.59
  region net $2N80054: 3991.39,3368.43 3991.39,3353.43 4013.89,3351.31 4013.89,3374.94
  region net $2N80065: 4044.99,3278.81 4061.14,3301.31 4013.89,3301.31 4029.99,3278.81
  region net VCCBAT: 3755.84,3337.07 3770.84,3337.07 3782.36,3359.57 3737.09,3359.57
  region net $2N80053: 3921.3,3404.59 3921.3,3419.59 3898.8,3426.54 3898.8,3385.84
  region net $2N80053: 3853.59,3449.04 3851.26,3426.54 3887.34,3426.54 3868.59,3449.04
  region net $2N80061: 3344.6,3914.15 3329.6,3926.21 3329.6,3891.65 3344.6,3904.15
  region net VCCIN: 3331.94,3546.87 3309.44,3547.08 3309.44,3535.27 3331.68,3531.87
  region net $2N80065: 3331.47,3452.02 3331.94,3467.02 3300.63,3485.77 3309.44,3456.52
  region net VCCIN: 3401.38,3660.33 3401.38,3645.33 3423.88,3631.22 3423.88,3679.08
  region net VBUS: 4548.23,3358.93 4533.23,3358.93 4514.48,3336.43 4555.32,3336.43
  region net 5V: 4359.58,3319.94 4359.58,3304.94 4382.08,3289.18 4382.08,3336.43
  region net 3V3: 4545.6,4130.9 4545.6,4145.05 4524.86,4141.98 4535,4075.06
  region net SWDIO: 4470.62,4221.33 4451.64,4181.05 4456.29,4171.55 4492.68,4176.25
  region net SWCLK: 4471.2,4294.37 4467.75,4259.16 4478.68,4255.94 4519.36,4280.2
  region net 3V3: 4061.68,4210.94 4076.68,4198.44 4076.68,4227.71 4061.68,4220.94
  region net $2N80063: 3398.94,3849.64 3383.94,3862.14 3383.94,3830.57 3398.94,3839.64
  region net $2N80061: 3334.92,3914.15 3334.92,3904.15 3349.92,3891.65 3349.92,3921.64
  region net BOOT0: 4154.97,4125.32 4183.26,4135.93 4152.68,4154.84 4142.07,4126.56
  region net BOOT1: 4239.39,4120.43 4249.39,4120.43 4259.49,4134.93 4226.89,4134.93
  region net 3V3: 3352.23,4026.65 3352.23,4036.65 3337.23,4046.31 3337.23,4014.56
  region net PB5: 3288.21,4101.91 3288.21,4091.91 3303.21,4079.41 3303.21,4105.63
  region net PB5: 3317.54,4120.63 3307.54,4120.63 3303.21,4105.63 3330.04,4105.63
  region net PB5: 3279.76,4101.91 3264.76,4104.55 3264.76,4079.41 3279.76,4091.91
  region net PB5: 3300.31,4220.68 3287.81,4205.68 3322.81,4205.68 3310.31,4220.68
  region net PB5: 3317.54,4143.44 3329.35,4158.44 3295.04,4158.44 3307.54,4143.44
  region net PA8: 3391.04,4208.59 3413.92,4174.4 3423.92,4175.67 3443.77,4215.29
  region net $2N80065: 3716.56,3085.59 3739.06,3084.8 3739.06,3119.34 3716.56,3100.59
  region net $2N80065: 3814.71,3106.98 3814.71,3121.98 3792.21,3140.31 3792.21,3088.23
  region net $2N80065: 4044.99,3242.22 4029.99,3242.22 4022.98,3219.72 4063.74,3219.72
  region net $2N80065: 4007.07,3165.56 4011.02,3148.29 4053.45,3164.2 4022.98,3219.72
  region net $2N80065: 3905.72,3106.98 3928.22,3088.23 3928.22,3140.73 3905.72,3121.98
  region net $2N80065: 3997.28,3155.76 3955.97,3140.98 3981.37,3085.46 3997.28,3134.55
  region net $2N80065: 3909.1,3106.98 3909.1,3121.98 3886.6,3140.73 3886.6,3088.23
  region net $2N80065: 3810.95,3106.98 3833.45,3088.23 3833.45,3140.73 3810.95,3121.98
  region net $2N80053: 3853.59,3450.1 3868.59,3450.1 3878.81,3472.6 3834.84,3472.6
  region net VCCBAT: 3755.84,3340.25 3749.17,3317.75 3789.59,3317.75 3770.84,3340.25
  region net 3V3: 3491.35,3699.3 3483.18,3693.23 3509.16,3693.23 3501.35,3699.36
  region net 3V3: 3491.43,3699.41 3483.18,3693.23 3509.16,3693.23 3501.43,3699.41
  region net 3V3: 3507.93,3460.94 3522.93,3470.32 3516.86,3487.78 3489.18,3482.2
  region net $2N80054: 3970.56,3350.14 3986.47,3353.43 3987.71,3368.43 3972.42,3372.57
  region net $2N80063: 4027.71,3568.14 4031.88,3555.86 4041.88,3556.32 4045.69,3568.97
  region net $2N80063: 3416,3853.1 3403.04,3849.64 3401.87,3839.64 3413.9,3835.23
  region net IO16: 3706.49,3934.06 3694.41,3929.69 3695.45,3919.69 3708.35,3916.16
  region net IO17: 3591.97,3881.85 3595.81,3869.23 3605.81,3868.84 3609.96,3881.15
  region net BOOT1: 4118.84,4085.93 4131.3,4089.93 4131.3,4099.93 4118.84,4103.93
  region net BOOT1: 3814.68,3749.32 3808.02,3737.71 3814.31,3729.86 3825.94,3735.28
  region net RESET: 4176.44,4055.69 4188.62,4059.97 4187.89,4069.97 4175.12,4073.65
  region net RESET: 3795.07,4033.26 3783.43,4039.4 3776.17,4032.52 3782.01,4020.88
  region net $2N62479: 4144.88,3656.73 4141.3,3669.59 4131.3,3670.54 4126.96,3658.44
  region net $2N62477: 4179.3,3656.38 4175.3,3668.84 4165.3,3668.84 4161.3,3656.38
  region net 3V3: 3390.94,4083.85 3394.55,4071.02 3404.55,4070.15 3408.87,4082.28
  region net 3V3: 3461.78,4130.13 3474.25,4134.13 3474.25,4144.13 3461.78,4148.13
  region net 3V3: 4252.23,3516.83 4248.48,3532.41 4233.48,3532.41 4229.73,3516.83
  region net 3V3: 4012.91,4228.06 3998.59,4220.94 4000.97,4210.94 4018.11,4206.17
  region net 3V3: 4032.22,4206.17 4049.36,4210.94 4051.74,4220.94 4037.42,4228.06
  region net $2N80056: 4289.23,3122.63 4266.73,3141.38 4266.73,3098.9 4289.23,3107.63
  region net 5V: 4248.7,3244.72 4229.95,3222.22 4266.73,3222.22 4263.7,3244.72
  region net 5V: 4190.02,3212.06 4190.02,3197.06 4212.52,3178.31 4212.52,3222.22
Bottom Layer:
  region net 3V3: 4414.87,4074.41 4536.52,4074.41 4536.52,4157.81 4414.87,4157.81
  region net 3V3: 4414.62,4074.48 4429.11,4059.99 4429.11,4059.67 4443.91,4074.48
  region net 3V3: 4294.69,3506.65 4325.63,3537.59 4325.63,3476.1 4325.62,3475.77
  region net 3V3: 4360.58,4001.06 4360.58,3986.06 4383.08,3967.31 4383.08,4019.71
  region net 3V3: 4436.71,4042.21 4421.71,4042.21 4402.96,4019.71 4438.59,4019.71
  region net 3V3: 4178.26,4166.04 4178.26,4151.04 4200.76,4141.89 4200.76,4179.29
  region net 3V3: 4305.94,4162.27 4283.44,4179.29 4283.44,4141.89 4305.94,4147.27
  region net EN: 4305.94,4110.19 4283.44,4128.94 4283.44,4091.89 4305.94,4095.19
  region net IO16: 3589.79,3660.92 3574.79,3673.42 3574.79,3641.89 3589.79,3650.92
  region net IO17: 3585.94,3708.04 3574.79,3720.54 3574.79,3691.89 3585.94,3698.04
  region net EN: 4324.63,4110.19 4324.63,4095.19 4347.13,4082.9 4347.13,4114.65
  region net 3V3: 4324.63,4162.27 4324.63,4147.27 4347.13,4142.22 4347.13,4173.97
  region net 3V3: 4403.64,4158.16 4381.14,4173.97 4381.14,4142.22 4403.64,4143.16
  region net $2N80054: 3926.57,3354.67 3926.57,3369.67 3904.07,3388.42 3904.07,3335.92
  region net VCCIN: 3248.97,3532.38 3286.88,3513.63 3277.51,3566.13 3248.97,3547.38
  region net 3V3: 4454.83,4145.36 4468.07,4105.61 4505.94,4141.98 4465.44,4155.97
  region net $2N62477: 4238.58,3286.05 4228.58,3286.05 4216.08,3276.21 4244.71,3276.21
  region net $2N62479: 4173.6,3291.21 4163.99,3276.21 4195.49,3276.21 4183.6,3291.21
  region net VCCIN: 3387.56,4358.27 3366.09,4337.79 3366.09,4322.79 3394.91,4305.63
  region net $2N80054: 3951.68,3373.42 3936.1,3369.67 3936.1,3354.67 3951.68,3350.92
  region net $2N80063: 4028.4,3585.48 4015.93,3581.48 4015.93,3571.48 4028.4,3567.48
  region net $2N80063: 3413.83,3835.3 3417.83,3822.84 3427.83,3822.84 3431.83,3835.3
  region net IO16: 3705.85,3918.55 3709.59,3905.84 3719.59,3905.24 3723.82,3917.47
  region net IO17: 3595.61,3878.85 3600.47,3867.36 3610.47,3871.08 3612.48,3885.13
  region net BOOT1: 4101.9,4087 4105.9,4074.53 4115.9,4074.53 4119.9,4087
  region net BOOT1: 3826.41,3735.26 3838.05,3729.58 3844.73,3737.04 3838.42,3748.67
  region net RESET: 4176.86,4072.03 4172.86,4084.49 4162.86,4084.49 4158.86,4072.03
  region net RESET: 3805.31,4017.31 3813.19,4028.78 3808.13,4037.87 3796.56,4033.03
  region net $2N62479: 4126.17,3641.75 4130.17,3629.28 4140.17,3629.28 4144.17,3641.75
  region net $2N62477: 4161.3,3640.51 4165.3,3628.04 4175.3,3628.04 4179.3,3640.51
  region net 3V3: 3412.57,4090.22 3418.55,4101.86 3411.48,4108.93 3399.84,4102.95
  region net 3V3: 3442.65,4143.44 3434.55,4132 3439.4,4122.7 3450.96,4127.48
  region net 3V3: 3583.64,3360.8 3599.21,3364.55 3599.21,3379.55 3583.64,3383.3
  region net 3V3: 4250.9,3495.66 4266.48,3499.41 4266.48,3514.41 4250.9,3518.16
  region net 3V3: 4024.15,4204.44 4037.82,4196.05 4048.47,4206.6 4040.14,4220.27
  region net 3V3: 4024.15,4204.44 4037.82,4196.05 4048.47,4206.6 4040.14,4220.27